# Altium PCB board.PcbDoc
Units mm, origin at the board's own origin, x right, y up, seen from the top; angles counter-clockwise.
Board outline 48 x 26.5 mm, 2 copper layers (Top Layer, Bottom Layer), stack 0.97 mm thick; 25 components, 16 nets, 80 pads, 6 vias.
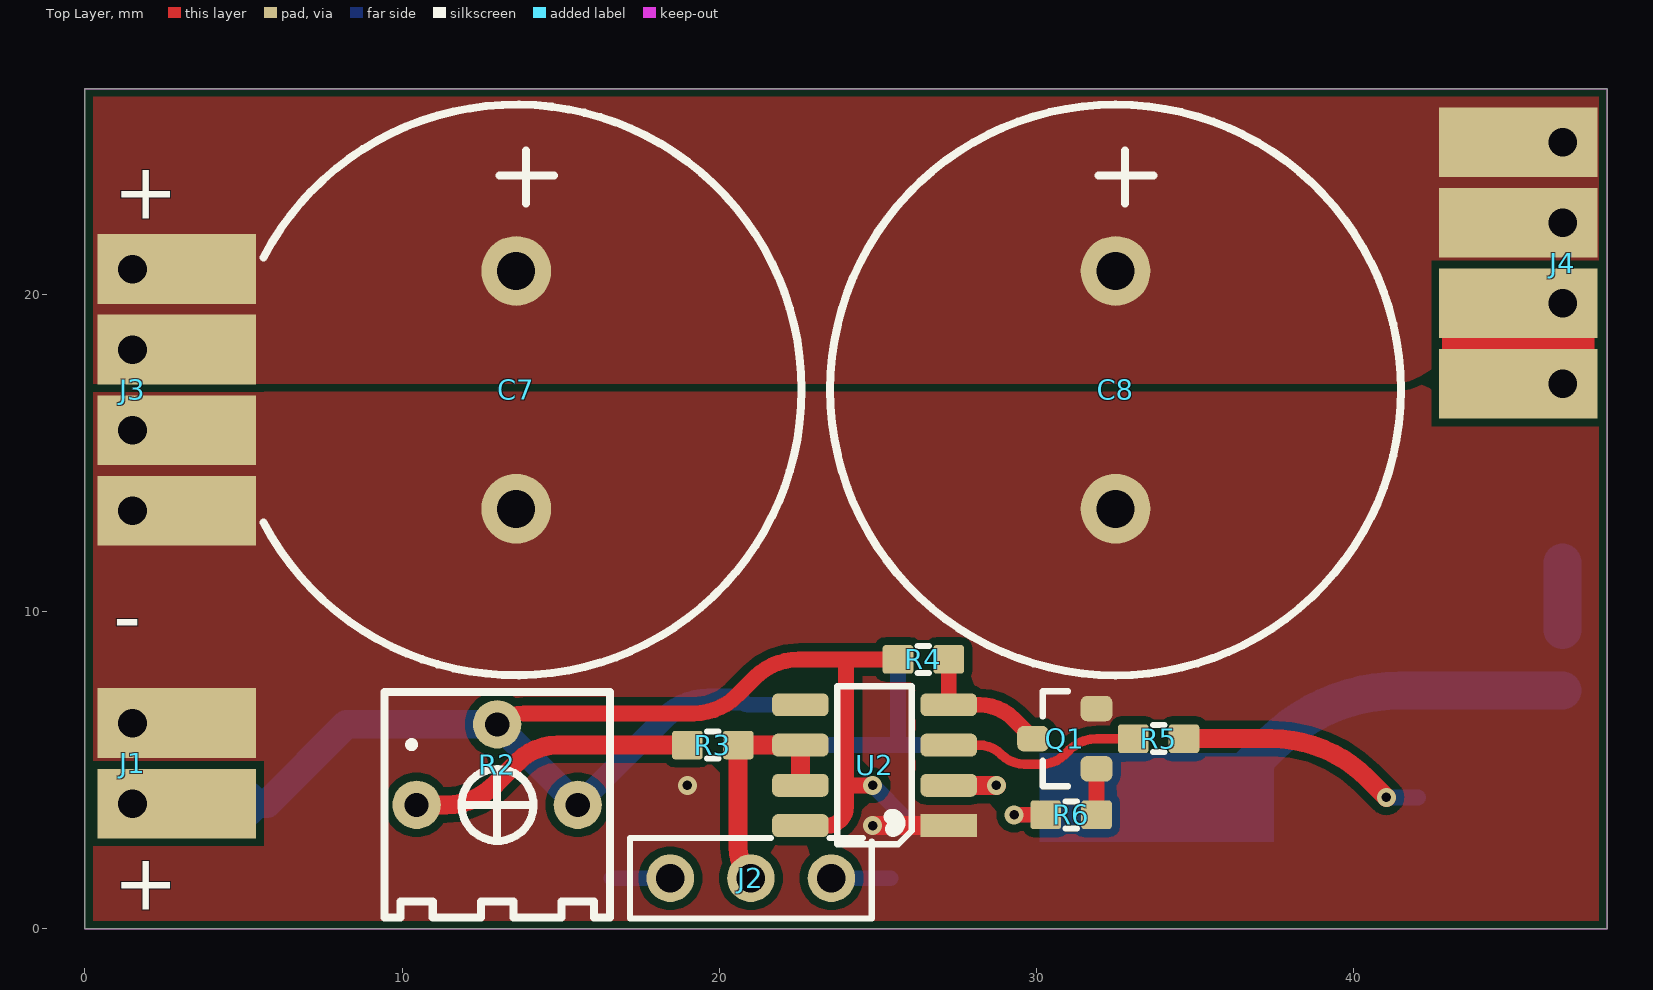
[diagram p0: Top Layer view]
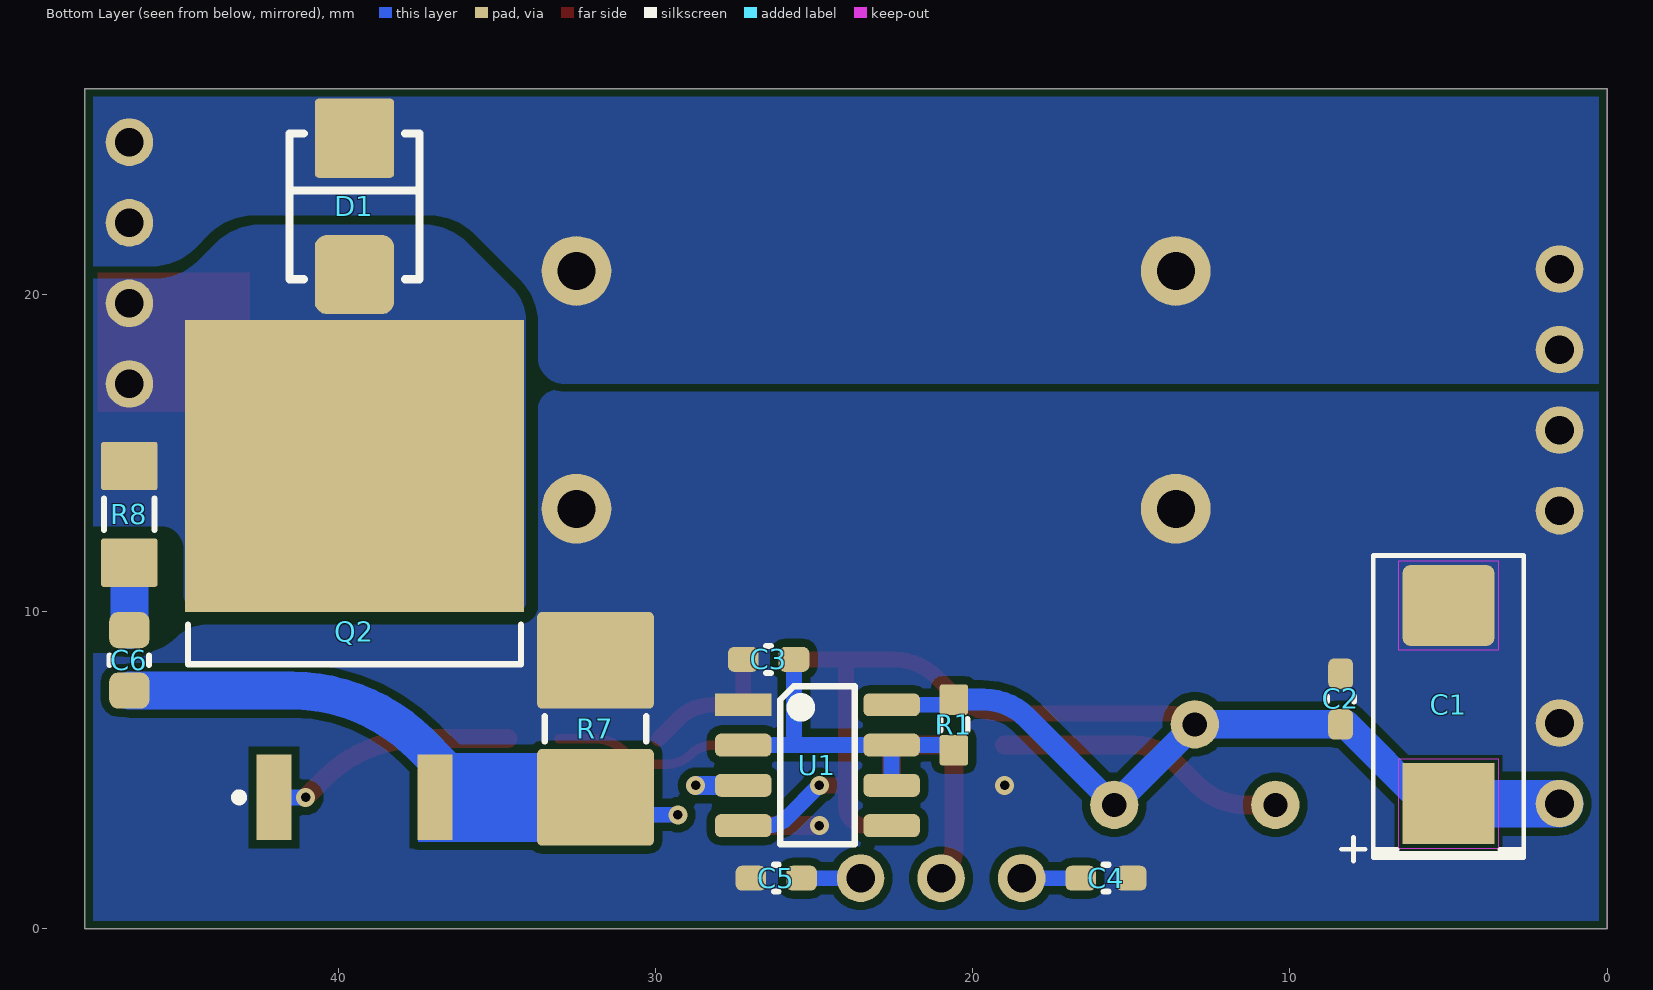
[diagram p1: Bottom Layer view, seen from below]
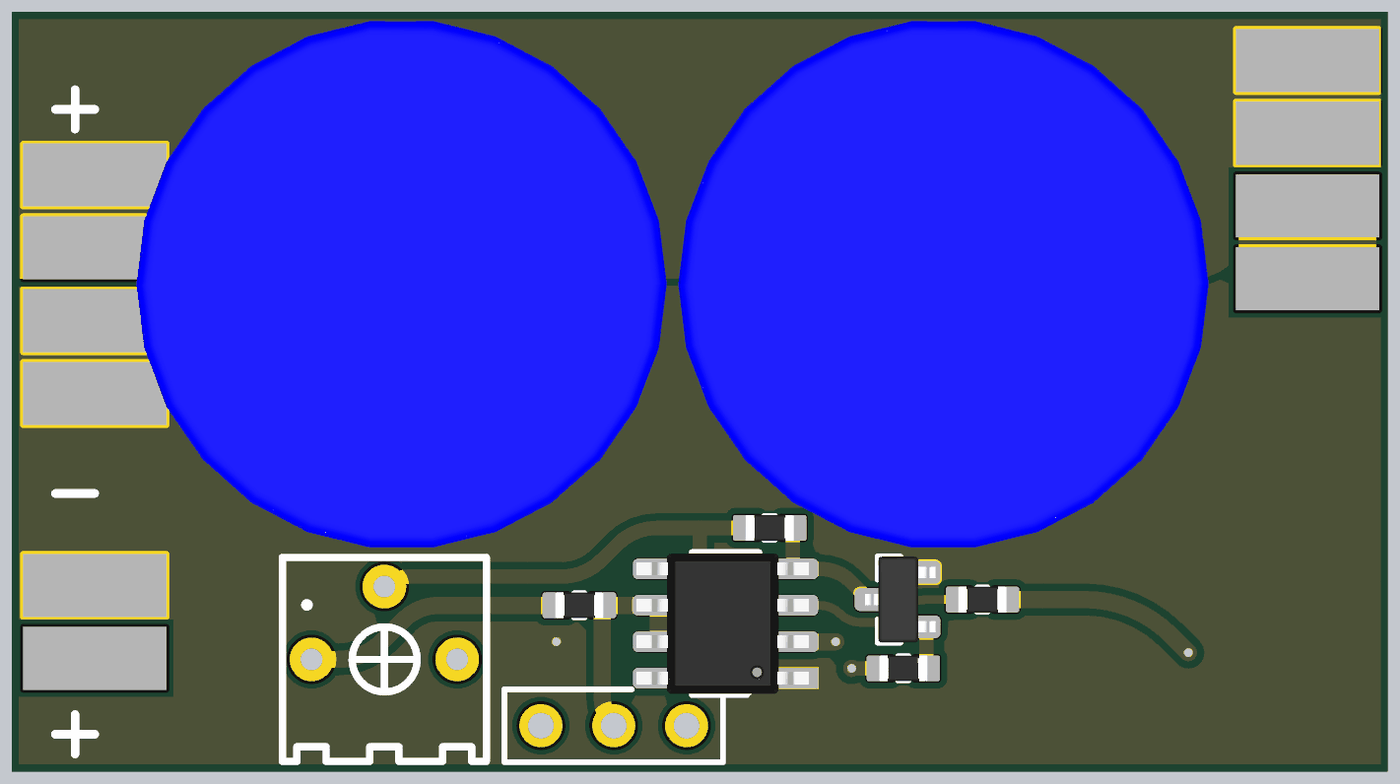
[diagram p2: 3D render of the assembled board from above, using the file's embedded part models]
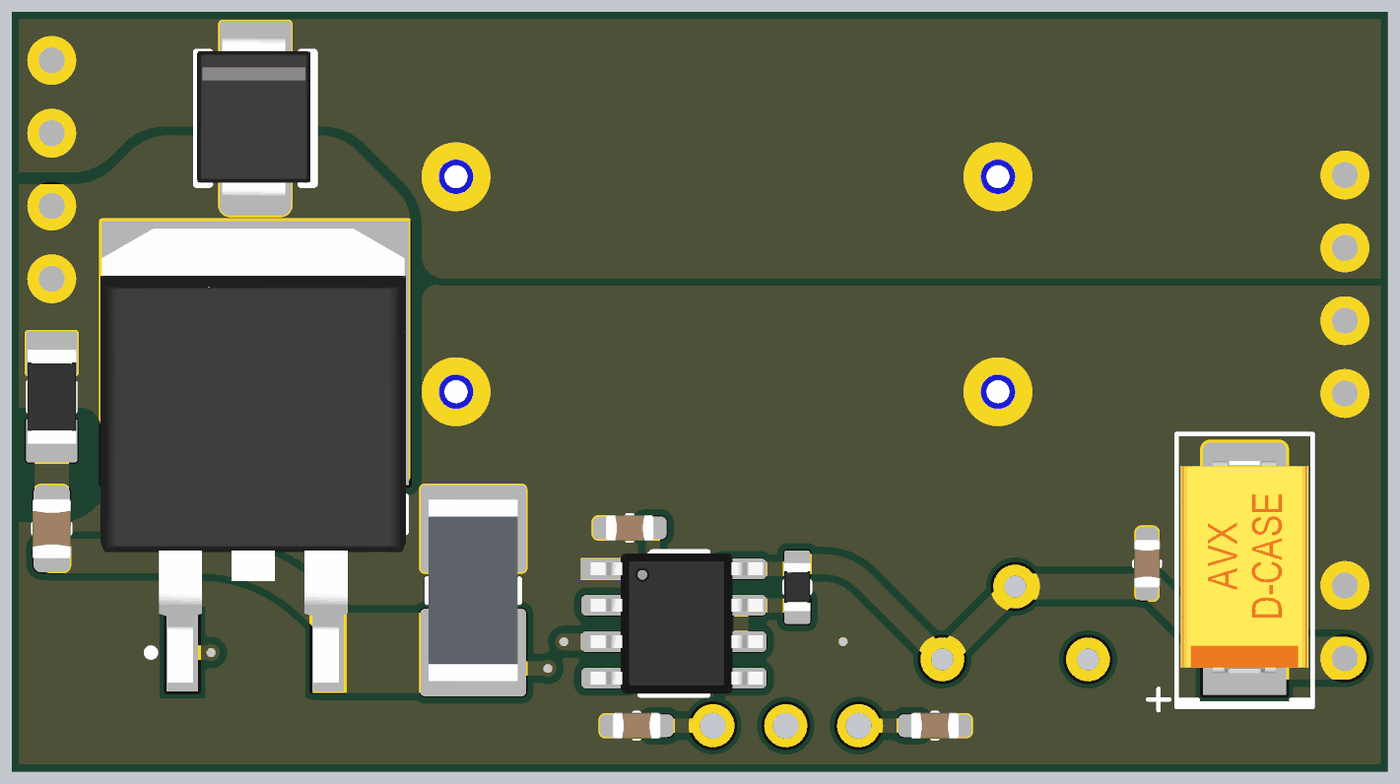
[diagram p3: 3D render of the assembled board from below, using the file's embedded part models]

## Layer stack, top to bottom
Top Solder: solder mask 0.0127, Solder Resist, Dk 3.8
Top Layer: signal copper 0.035
Dielectric: core 0.9, FR-4, Dk 4.5
Bottom Layer: signal copper 0.035
Bottom Solder: solder mask 0.0127, Solder Resist, Dk 3.8

## Board outline
0,0 0,26.5 48,26.5 48,0

## Design rules (kind name [scope] priority, off if disabled: settings)
AcuteAngle [All] p1: minimum=6.00000000000000E+0001 checktracksonly=FALSE
Clearance Clearance_1 [All] p1: gap=0.25 ignorepadtopadclearanceinfootprint=FALSE except(0.13: Arc-Arc Arc-Track Arc-SMDPad Arc-Via Track-Track Track-SMDPad Track-Via SMDPad-SMDPad SMDPad-Via THPad-Via Via-Via; 0.15: Arc-THPad Arc-Text Arc-Hole Track-THPad Track-Text Track-Hole SMDPad-THPad SMDPad-Text SMDPad-Hole THPad-THPad THPad-Text THPad-Hole Via-Text Via-Hole Fill-Text Fill-Hole Poly-Text Poly-Hole Region-Text Region-Hole Text-Text Text-Hole)
ComponentClearance ComponentClearance_1 [HasFootprint('RES-ADJ-TH_3362P-1-104LF') OR HasFootprint('HDR-1X3')] p1: gap=-1 collisioncheckmode=3 verticalgap=2540 showdistances=FALSE
ComponentClearance [All] p2: gap=0.3 collisioncheckmode=3 verticalgap=0.254 showdistances=FALSE
HoleSize [All] p1: absolutevalues=TRUE maxlimit=6 minlimit=0.2 maxpercent=80.000 minpercent=20.000
HoleToHoleClearance HoleToHoleClearance_1 [IsVia vs IsThruPin] p1: gap=0.7 allowstackedmicrovias=TRUE
HoleToHoleClearance [All] p2: gap=0.5 allowstackedmicrovias=TRUE
MinimumSolderMaskSliver [All] p1 off: minsoldermaskwidth=0.254
PlaneClearance [All] p1: clearance=0.45
PlaneConnect [All] p1: planeconnectstyle=Direct reliefexpansion=0.3 reliefentries=4 reliefconductorwidth=0.381 reliefairgap=0.178
PolygonConnect [All] p1: connectstyle=Direct reliefconductorwidth=0.381 reliefentries=4 polygonreliefangle="90 Angle" airgapwidth=0.356
RoutingVias [All] p1: holewidth=0.3 width=0.6 viastyle="Through Hole" minholewidth=0.2 minwidth=0.45 maxholewidth=0.9 maxwidth=1.27
SilkToSilkClearance [All] p1 off: silktosilkclearance=0.254
SilkToSolderMaskClearance [IsPad] p1 off: minsilkscreentomaskgap=0.254 clearancetoexposedcopper=TRUE
SolderMaskExpansion [All] p1: expansion=0.102 istentingtop=FALSE
UnRoutedNet [All] p1: checkbadconnections=TRUE
Width [All] p1: maxlimit=3.81 minlimit=0.14 preferedwidth=0.254
21 further rules are at their usual default settings.

## Components (designator, comment, footprint, x,y, rotation, side; value= is the part's Value field where it differs from the comment)
C1 "220uF" C7343 5,7.14 r90 bottom
C2 "100n" C0603 8.4,7.253 r270 bottom
C3 "1n" C0603 26.44,8.5 r180 bottom
C4 "1n" C0603 15.8,1.6 r0 bottom
C5 "1n" C0603 26.2,1.6 r180 bottom
C6 "4n7" C0805 46.6,8.47 r90 bottom
C7 "220uF" CAP-TH_BD16.0-P7.50-D1.2-FD 13.6,17 r270 top
C8 "220uF" CAP-TH_BD16.0-P7.50-D1.2-FD 32.5,17 r270 top
D1 "" SMB 39.5,22.788 r90 bottom
J1 "Header 2" HDR-1X2 1.5,5.222 r180 top
J2 "" HDR-1X3 21,1.6 r90 top
J3 "Header 4" HDR-1X4 1.5,17 r0 top
J4 "Header 4" HDR-1X4 46.6,21 r0 top
Q1 "MMBT2222A" SOT-23 30.9,6 r0 top
Q2 "" D2PAK 39.5,11 r90 bottom
R1 "2M2" R0603 20.6,6.434 r90 bottom
R2 "100kΩ" RES-ADJ-TH_3362P-1-104LF 13,5.183 r90 top
R3 "2k2" R0603 19.8,5.799 r180 top
R4 "10k" R0603 26.44,8.5 r180 top
R5 "10" R0603 33.859,6 r180 top
R6 "100" R0603 31.1,3.6 r0 top
R7 "10mR" R2512-WIDE 31.9,6.31 r270 bottom
R8 "2R2" R1206 46.6,13.076 r90 bottom
U1 "555" SOIC-8 24.9,5.164 r270 bottom
U2 "555" SOIC-8 24.9,5.164 r90 top

## Footprints (in the part's own frame and the unit in brackets; to place one, negate y for a bottom-side part, rotate by r counter-clockwise, add the part's x,y. Pads: shape width x height; smd on the part's side, far side on the other; paste and mask are expansions set on the pad)
C0603 [mil] "Chip Capacitor"
  rrect50% 38x31 smd mask+1.97: 1(-31.5,0) 2(31.5,0)
  silkscreen extent -3,-17 3,17, body extent -33,-18 33,18, height 35
C0805 [mil] "Chip Capacitor"
  rrect50% 45x50 smd mask+1.97: 1(-37.5,0) 2(37.5,0)
  silkscreen extent -6,-25 6,25, body extent -41,-27 41,27, height 53
C7343 [mm] "C7343_1"
  rect 2.55x2.9 smd: 1(-3.188,0)
  rrect20% 2.55x2.9 smd: 2(3.061,0)
  Top Layer keep-out region: -4.591,1.577 -4.591,-1.577 -1.786,-1.577 -1.786,1.577
  Top Layer keep-out region: 1.659,1.577 1.659,-1.577 4.464,-1.577 4.464,1.577
  silkscreen extent -5,-2.37 4.64,3.37, body extent -3.7,-2.22 3.7,2.22, height 3.01
CAP-TH_BD16.0-P7.50-D1.2-FD [mm]
  round 2.2 hole 1.2: 1(-3.75,0) 2(3.75,0)
  silkscreen extent -9,-7.97 9,9, body extent -9.24,-9.25 9.24,9.25, height 20
D2PAK [mm] "D2-PAK, 4-Leads, Body 8.8x10.4mm, Pitch 2.54mm, Lead Span 15.1mm, IPC Low Density"
  rect 2.7x1.1 smd: 1(-6.85,2.54) 3(-6.85,-2.54)
  rect 9.2x10.7 smd: 2(3.6,0)
  silkscreen extent -6.97,-5.25 -1.4,5.25, body extent -7.9,-5.25 7.95,5.39, height 4.8
HDR-1X2 [mm]
  round 1.5 hole 0.9: 1(0,1.27) 2(0,-1.27)
HDR-1X3 [mm]
  round 1.5 hole 0.9: 1(0,2.54) 2(0,0) 3(0,-2.54)
  silkscreen extent -1.27,-3.81 1.27,3.81
HDR-1X4 [mm]
  round 1.5 hole 0.9: 1(0,3.81) 2(0,1.27) 3(0,-1.27) 4(0,-3.81)
R0603 [mil] "Chip Resistor; Body 1.6 x 0.8 mm (LxW typ)"
  rrect20% 38x35.43 smd mask+1.97: 1(-31.5,0) 2(31.5,0)
  silkscreen extent -7,-17 7,17, body extent -33,-18 33,18, height 22
R1206 [mil] "Chip Resistor"
  rrect10% 60x70 smd mask+1.97: 1(-60,0) 2(60,0)
  silkscreen extent -20,-31 20,31, body extent -65,-33 65,33, height 26
R2512-WIDE [mm] "Chip Resistor; Body 6.4 x 3.2 mm (LxW typ)"
  rrect10% 3.05x3.68 smd mask+0.05: 1(-2.16,0) 2(2.16,0)
  silkscreen extent -0.4,-1.6 0.4,1.6, body extent -3.19,-1.55 3.16,1.55, height 0.55
RES-ADJ-TH_3362P-1-104LF [mil]
  round 60 hole 30: 1(-50,100) 2(50,0) 3(-50,-100)
  silkscreen extent -190,-140 90,140
SMB [mm]
  rrect30% 2.5x2.5 smd mask+0.05: 1(-2.15,0)
  rrect10% 2.5x2.5 smd mask+0.05: 2(2.15,0)
  silkscreen extent -2.3,-2.05 2.3,2.05, body extent -2.75,-1.93 2.85,2.02, height 2.65
SOIC-8 [mm]
  rect 0.72x1.78 smd mask+0.025: 1(-1.905,-2.34)
  rrect50% 0.72x1.78 smd mask+0.025: 2(-0.635,-2.34) 3(0.635,-2.34) 4(1.905,-2.34) 5(1.905,2.34) 6(0.635,2.34) 7(-0.635,2.34) 8(-1.905,2.34)
  silkscreen extent -2.49,-1.17 2.49,1.17, body extent -2.45,-2.9 2.45,3.1, height 1.7
SOT-23 [mm]
  rrect50% 1x0.8 smd mask+0.05: 1(1,-0.95) 2(1,0.95) 3(-1,0)
  silkscreen extent -0.7,-1.5 0.1,1.5, body extent -1.27,-1.5 1.33,1.5, height 1.1

## Part data
C1 C7 C8: BOM_JLCPCB Part Class="Extended Part", BOM_Manufacturer=Nichicon(尼吉康), BOM_Manufacturer Part=UPW2A221MHD, BOM_Supplier=LCSC, BOM_Supplier Part=C433274, Contributor=LCSC, nameAlias=Capacitance, spicePre=C, spiceSymbolName=UPW2A221MHD
C2: library part CAP, "100nF 50V 0603"
C3 C4 C5: library part CAP, "1nF 50V 0603"
C6: library part CAP, "4.7nF 50V 0805"
D1: library part US1M-13-F
J1 J3 J4: LCSC part number=-, P/N=-
J2: library part "Header 3", LCSC part number=-, P/N=-
Q1: library part MMBT2222ALT1G, "MMBT2222", LCSC part number=C82460, P/N=MMBT2222ALT1G
Q2: library part 2N7002
R1: library part RES_0402_1K5-1%, "2M2 5% 0603"
R2: BOM_JLCPCB Part Class="Extended Part", BOM_Manufacturer=BOURNS, BOM_Manufacturer Part=3362P-1-104LF, Resistance (Ohms)=100K, BOM_Supplier=LCSC, BOM_Supplier Part=C81266, nameAlias=Resistance, Resistance(Ohms)=100K, spicePre=R, spiceSymbolName=3362P-1-104LF
R3: library part RES_0402_1K5-1%, "2k2 5% 0603"
R4: library part RES_0402_1K5-1%, "10k 5% 0603"
R5: library part RES_0402_1K5-1%, "10R 5% 0603"
R6: library part RES_0402_1K5-1%, "100R 5% 0603"
R7: library part RES, "10mR shunt 2512"
R8: library part RES_0402_1K5-1%, "2R2 5% 1206"
U1 U2: BOM_JLCPCB Part Class="Extended Part", BOM_Manufacturer=IDCHIP(英锐芯), BOM_Manufacturer Part=NE555, BOM_Supplier=LCSC, BOM_Supplier Part=C5125085, Contributor=lcsc, spicePre=U, spiceSymbolName=NE555_C5125085

## Free pads (board coordinates)
  rect 5x2.2 smd: 2(2.9,3.952) 2(2.9,6.492) 2(2.9,13.19) 2(2.9,15.73) 2(2.9,18.27) 2(2.9,20.81) 2(45.2,17.19) 2(45.2,19.73) 2(45.2,22.27) 2(45.2,24.81)

## Via types
v1: diameter 0.6, hole 0.3, Top Layer to Bottom Layer, tented both sides, 6 vias

## Nets (pads, with @x,y where several pads share a name; then routed paths per layer and width w, separated by ;. In a path a pad name is that pad's centre, name@x,y a point inside that pad or via, vN(x,y) a via of type N, cw(c..) or ccw(c..) an arc to the next point about the centre after c; other vN are vias at no path point)
GND: C1.2 C2.1 C3.1 C4.1 C5.1 C7.2 C8.2 J1.2 J3.3 J3.4 pad.2@2.9,6.492 pad.2@2.9,13.19 pad.2@2.9,15.73 Q1.2 R7.1 U1.1 U2.1 | length 2.4
  Top Layer w0.6: v1(24.84,3.259) U2.1
  other v1: 19,4.529
NetC1_1: C1.1 C2.2 J1.1 pad.2@2.9,3.952 R1.2 R2.2 R2.3 R4.2 U1.4 U1.8 U2.8 | length 47.9
  Top Layer w0.5: R2.2 cw(c13.838,5.615) 13.838,6.8 19.19,6.8 ccw(c19.19,8.756) 20.573,7.373 21.127,7.927 cw(c22.51,6.544) 22.51,8.5 24,8.5 ; U2.8 23.405,3.259 ccw(c23.405,3.854) 24,3.854 24,4.529 ; v1(24.84,4.529) 24,4.529 ; R4.2 24,8.5 ; 24,4.529 24,8.5
  Bottom Layer w0.5: R1.2 ccw(c20.998,7.632) 20.998,7.069 U1.8 ; v1(24.84,4.529) 25.855,3.515 ccw(c26.471,4.131) 26.471,3.259 U1.4
  Bottom Layer w0.7: R2.3 18.288,6.661 cw(c19.671,5.278) 19.671,7.234 R1.2
  Bottom Layer w0.8: R2.2 R2.3
  Bottom Layer w0.9: C1.1 5.741,3.952 8.243,6.453 C2.2 R2.2
  Bottom Layer w1.5: J1.1 C1.1
NetC3_2: C3.2 R1.1 U1.2 U1.6 U1.7 | length 10.6
  Bottom Layer w0.5: R1.1@20.6,5.799 U1.7 ; U1.6 U1.7 ; 25.64,5.799 C3.2 ; U1.2 U1.7
NetC4_2: C4.2 J2.1 | length 1.9
  Bottom Layer w0.5: C4.2 J2.1
NetC5_2: C5.2 J2.3 | length 1.9
  Bottom Layer w0.5: J2.3 C5.2
NetC6_1: C6.1 Q2.3 R6.1 R7.2 | length 13.6
  Top Layer w0.5: v1(29.3,3.6) R6.1
  Bottom Layer w0.5: v1(29.3,3.6) R7.2@31.35,3.6
  Bottom Layer w1.2: Q2.3@36.753,5.158 37.437,5.842 cw(c41.481,1.798) 41.481,7.518 C6.1
NetC6_2: C6.2 R8.1 | length 2.1
  Bottom Layer w1.2: C6.2 R8.1
NetC7_1: C7.1 C8.1 D1.2 J3.1 J3.2 J4.1 J4.2 pad.2@2.9,18.27 pad.2@2.9,20.81 pad.2@45.2,22.27 pad.2@45.2,24.81
NetD1_1: D1.1 J4.3 J4.4 pad.2@45.2,17.19 pad.2@45.2,19.73 Q2.2 R8.2
NetJ2_2: J2.2 R3.1 U2.6 U2.7 | length 7.5
  Top Layer w0.6: J2.2 cw(c21.966,2.566) 20.6,2.566 R3.1 U2.6 U2.7
NetQ1_1: Q1.1 R6.2 | length 1.4
  Top Layer w0.5: R6.2 Q1.1
NetQ1_3: Q1.3 R4.1 U2.4 | length 4.5
  Top Layer w0.5: R4.1 U2.4 28.21,7.069 cw(c28.21,5.571) 29.27,6.63 Q1.3
NetQ2_1: Q2.1 R5.1 | length 8
  Top Layer w0.6: R5.1 37.419,6 cw(c37.419,1.724) 40.442,4.748 v1(41.04,4.15)
  Bottom Layer w0.5: v1(41.04,4.15) Q2.1
NetR2_1: R2.1 R3.2 | length 9.2
  Top Layer w0.6: R2.1 11.392,3.913 ccw(c11.392,6.079) 12.924,4.547 13.664,5.288 cw(c14.899,4.054) 14.899,5.799 R3.2
NetR5_2: R5.2 U2.3 | length 6.2
  Top Layer w0.3: U2.3 28.178,5.799 cw(c28.178,4.778) 28.9,5.5 ccw(c29.624,6.224) 29.624,5.2 30.176,5.2 ccw(c30.176,6.224) 30.9,5.5 31.046,5.646 cw(c31.9,4.793) 31.9,6 R5.2
NetU1_3: U1.3 U2.2 | length 3
  Top Layer w0.6: U2.2 v1(28.74,4.529)
  Bottom Layer w0.6: U1.3 v1(28.74,4.529)
pads on no net: U1.5 U2.5

## Polygon pours and split planes (outlines as drawn)
GND on Bottom Layer "NONET_L02_P-001" (solid, remove dead copper, pour order 2): 45.1,9.2 ccw(c46.307,10.407) 46.307,8.7 48.7,8.7 48.7,-1.2 -0.2,-1.2 -0.2,17 33.1,17 cw(c33.1,16.4) 33.7,16.4 33.7,10.2 ccw(c34.3,10.2) 34.3,9.6 44.134,9.6 cw(c44.134,8.234)
NetC7_1 on Bottom Layer "NONET_L02_P-001" (solid, remove dead copper, pour order 1): -0.8,17.2 32.9,17.2 ccw(c32.9,18) 33.7,18 33.7,19.09 cw(c35.656,19.09) 34.273,20.473 35.727,21.927 cw(c37.11,20.544) 37.11,22.5 42.69,22.5 cw(c42.69,20.544) 44.073,21.927 44.527,21.473 ccw(c45.91,22.856) 45.91,20.9 48.4,20.9 48.4,27.7 -0.8,27.7
NetD1_1 on Bottom Layer "NONET_L02_P-001" (solid, remove dead copper, pour order 0): 44.888,10.483 44.888,11.988 cw(c45.6,11.988) 45.6,12.7 48.5,12.7 48.5,20.5 45.81,20.5 cw(c45.81,22.456) 44.427,21.073 43.873,21.627 ccw(c42.49,20.244) 42.49,22.2 37.31,22.2 ccw(c37.31,20.244) 35.927,21.627 34.524,20.224 ccw(c35.549,19.2) 34.1,19.2 34.1,10.3 ccw(c34.4,10.3) 34.4,10 44.3,10 ccw(c44.3,10.6)
GND on Top Layer "NONET_L02_P-001" (solid, remove dead copper, pour order 4): 41.19,17 ccw(c41.19,18.956) 42.573,17.573 45.186,20.186 cw(c46.569,18.804) 46.569,20.759 48.7,20.759 48.7,-1.2 -0.2,-1.2 -0.2,17
NetC7_1 on Top Layer "NONET_L02_P-001" (solid, remove dead copper, pour order 3): 41.19,17.2 ccw(c41.19,19.156) 42.573,17.773 45.127,20.327 cw(c46.51,18.944) 46.51,20.9 47.155,20.9 48.4,20.9 48.4,27.7 -0.8,27.7 -0.8,17.2

## Keep-outs
Keep-Out Layer:
  the board outline again, w0

## Other copper
Top Layer:
  rectangle net NetD1_1: 42.8,16.3 47.6,20.7
Bottom Layer:
  rectangle net NetC6_1: 30.1,2.75 37.5,5.55

## Silkscreen, mask and mechanical layers (free items; w line width, h text height)
Top Overlay:
  text "+" at 0.9,22.4 h1.8
  text "-" at 0.9,9 h1.8
  text "+" at 0.9,0.6 h1.8